# EAGLE board Exterior (EAGLE 6.4)
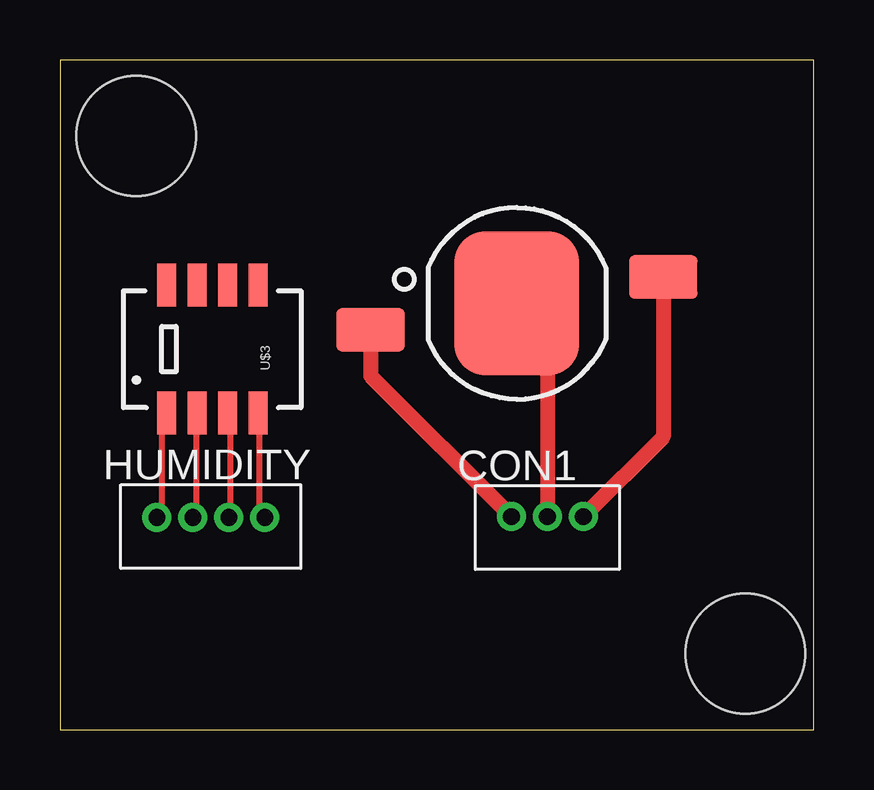
[diagram p0: board, top side]

Size 31.42 x 27.93 mm. Coordinates in mm from the lower left corner, seen from the top.
Outline: 0,0 31.42,0 31.42,27.93 0,27.93 0,0
Copper layers (1*16): Top 0.035mm / dielectric 1.5mm / Bottom 0.035mm
Design rules "default": minimum track width 10mil, minimum drill 24mil, track to track 8mil, track to pad 8mil, pad to pad 8mil, via to via 8mil, smd to smd 8mil, copper to edge 40mil, drill to drill 8mil, minimum pad ring 10mil, minimum via ring 8mil, stop-mask expansion 4mil, vias tented up to drill 0mil, thermal gap 10mil
Holes 5 mm at 3.17,24.77 28.57,3.17

## Footprints (pad centres in the part's own frame; a part is rotated, then mirrored left to right if it is on the bottom)
B3B-ZR = drill 0.7 pad 1.1: 1 -1.5,0; 2 0,0; 3 1.5,0
B4B-ZR = drill 0.7: 1 6,-1.3; 2 4.5,-1.3; 3 3,-1.3; 4 1.5,-1.3
LUXEON = smd 2.85 x 1.8: A -6.1,-1.1; C 6.1,1.1 | smd 5.2 x 6: S 0,0
SHT1X = smd 1.8 x 0.8: 1 -2.667,1.905; 2 -2.667,0.635; 3 -2.667,-0.635; 4 -2.667,-1.905; 5 2.667,-1.905; 6 2.667,-0.635; 7 2.667,0.635; 8 2.667,1.905

## Placement (x,y rotation side)
CON1  B3B-ZR  [B3B-ZR]  20.32,8.89 0 top
HUMIDITY  B4B-ZR  [B4B-ZR]  2.54,10.16 0 top
U$1  LUXEONSMD  [LUXEON]  19.05,17.78 0 top
U$3  SHT1XSMD  [SHT1X]  6.35,15.88 90 top

## Library data of the parts
CON1 HUMIDITY = jst
U$1 = SparkFun-LED
U$3 = SparkFun-Sensors

## Nets
N$1: CON1.2 U$1.S
N$2: HUMIDITY.3 U$3.2
N$3: HUMIDITY.4 U$3.1
N$4: CON1.1 U$1.A
N$5: CON1.3 U$1.C
N$6: HUMIDITY.2 U$3.3
N$7: HUMIDITY.1 U$3.4

## Tracks (layer width: path | path; a pad name or v marks a point on that pad's centre or on a via)
N$1
  Top 0.406: U$1.S 20.32,16.51
  Top 0.635: 20.32,16.51 CON1.2
N$2
  Top 0.254: U$3.2 5.69,13.21 5.69,8.94 HUMIDITY.3
N$3
  Top 0.254: U$3.1 4.27,13.21 4.27,9.14 4.06,8.94 HUMIDITY.4
N$4
  Top 0.635: U$1.A 12.95,14.76 CON1.1
N$5
  Top 0.635: U$1.C 25.15,12.22 CON1.3
N$6
  Top 0.254: U$3.3 7.11,13.21 7.11,8.94 HUMIDITY.2
N$7
  Top 0.254: U$3.4 8.33,13.21 8.33,9.14 8.53,8.94 HUMIDITY.1